# EAGLE board open1541 (EAGLE 5.01)

Size 90 x 60 mm. Coordinates in mm from the lower left corner, seen from the top.
Outline: 0,0 90,0 90,60 0,60 0,0
Copper layers (1*16): Top 0.035mm / dielectric 1.5mm / Bottom 0.035mm
Design rules "default *": minimum track width 8mil, minimum drill 24mil, track to track 8mil, track to pad 8mil, pad to pad 8mil, via to via 8mil, smd to smd 6mil, copper to edge 40mil, drill to drill 8mil, minimum pad ring 10mil, minimum via ring 8mil, stop-mask expansion 4mil, vias tented up to drill 0mil, thermal gap 10mil

## Footprints (pad centres in the part's own frame; a part is rotated, then mirrored left to right if it is on the bottom)
RN-5 = drill 0.813 long: 1 -5.08,0; 2 -2.54,0; 3 0,0; 4 2.54,0; 5 5.08,0
C050-024X044 = drill 0.813 octagon: 1 -2.54,0; 2 2.54,0
SQFP-S-10X10-64 = smd 0.3 x 1.6: 1 -3.75,-5.6; 2 -3.25,-5.6; 3 -2.75,-5.6; 4 -2.25,-5.6; 5 -1.75,-5.6; 6 -1.25,-5.6; 7 -0.75,-5.6; 8 -0.25,-5.6; 9 0.25,-5.6; 10 0.75,-5.6; 11 1.25,-5.6; 12 1.75,-5.6; 13 2.25,-5.6; 14 2.75,-5.6; 15 3.25,-5.6; 16 3.75,-5.6; 33 3.75,5.6; 34 3.25,5.6; 35 2.75,5.6; 36 2.25,5.6; 37 1.75,5.6; 38 1.25,5.6; 39 0.75,5.6; 40 0.25,5.6; 41 -0.25,5.6; 42 -0.75,5.6; 43 -1.25,5.6; 44 -1.75,5.6; 45 -2.25,5.6; 46 -2.75,5.6; 47 -3.25,5.6; 48 -3.75,5.6 | smd 1.6 x 0.3: 17 5.6,-3.75; 18 5.6,-3.25; 19 5.6,-2.75; 20 5.6,-2.25; 21 5.6,-1.75; 22 5.6,-1.25; 23 5.6,-0.75; 24 5.6,-0.25; 25 5.6,0.25; 26 5.6,0.75; 27 5.6,1.25; 28 5.6,1.75; 29 5.6,2.25; 30 5.6,2.75; 31 5.6,3.25; 32 5.6,3.75; 49 -5.6,3.75; 50 -5.6,3.25; 51 -5.6,2.75; 52 -5.6,2.25; 53 -5.6,1.75; 54 -5.6,1.25; 55 -5.6,0.75; 56 -5.6,0.25; 57 -5.6,-0.25; 58 -5.6,-0.75; 59 -5.6,-1.25; 60 -5.6,-1.75; 61 -5.6,-2.25; 62 -5.6,-2.75; 63 -5.6,-3.25; 64 -5.6,-3.75
DIL8 = drill 0.8 square: 1 -3.81,3.81; 2 -3.81,1.27; 3 -3.81,-1.27; 4 -3.81,-3.81; 5 3.81,-3.81; 6 3.81,-1.27; 7 3.81,1.27; 8 3.81,3.81
DIL14 = drill 0.813 long: 1 -7.62,-3.81; 2 -5.08,-3.81; 3 -2.54,-3.81; 4 0,-3.81; 5 2.54,-3.81; 6 5.08,-3.81; 7 7.62,-3.81; 8 7.62,3.81; 9 5.08,3.81; 10 2.54,3.81; 11 0,3.81; 12 -2.54,3.81; 13 -5.08,3.81; 14 -7.62,3.81
SSOP28 = smd 0.4 x 1.5: 1 -4.225,-3.625; 2 -3.575,-3.625; 3 -2.925,-3.625; 4 -2.275,-3.625; 5 -1.625,-3.625; 6 -0.975,-3.625; 7 -0.325,-3.625; 8 0.325,-3.625; 9 0.975,-3.625; 10 1.625,-3.625; 11 2.275,-3.625; 12 2.925,-3.625; 13 3.575,-3.625; 14 4.225,-3.625; 15 4.225,3.625; 16 3.575,3.625; 17 2.925,3.625; 18 2.275,3.625; 19 1.625,3.625; 20 0.975,3.625; 21 0.325,3.625; 22 -0.325,3.625; 23 -0.975,3.625; 24 -1.625,3.625; 25 -2.275,3.625; 26 -2.925,3.625; 27 -3.575,3.625; 28 -4.225,3.625
JP1 = drill 0.914 long: 1 0,-1.27; 2 0,1.27
HC49/S = drill 0.813 round: 1 -2.413,0; 2 2.413,0
0204/7 = drill 0.813 octagon: 1 -3.81,0; 2 3.81,0
16P = drill 0.914 long: 1 -19.05,0; 2 -16.51,0; 3 -13.97,0; 4 -11.43,0; 5 -8.89,0; 6 -6.35,0; 7 -3.81,0; 8 -1.27,0; 9 1.27,0; 10 3.81,0; 11 6.35,0; 12 8.89,0; 13 11.43,0; 14 13.97,0; 15 16.51,0; 16 19.05,0
02P = drill 0.914 long: 1 -1.27,0; 2 1.27,0
04P = drill 0.914 long: 1 -3.81,0; 2 -1.27,0; 3 1.27,0; 4 3.81,0
MA06-2 = drill 1.016 octagon: 1 -6.35,-1.27; 2 -6.35,1.27; 3 -3.81,-1.27; 4 -3.81,1.27; 5 -1.27,-1.27; 6 -1.27,1.27; 7 1.27,-1.27; 8 1.27,1.27; 9 3.81,-1.27; 10 3.81,1.27; 11 6.35,-1.27; 12 6.35,1.27
DM1B-DSF-PEJ(22) = smd 1.25 x 2.5: 1 -6.875,15; 2 -4.375,15; 3 -1.875,15; 4 0.625,15; 5 3.125,15; 6 5.625,15; 7 8.05,15; 8 9.75,15; 9 -9.47,15; COMMON 12.8,15 | drill 1.3 pad 1.7 round: A1 -12.57,14.55; A2 -5.62,12.7; A3 2.03,12.7; A4 11.23,12.35 | drill 1.5 pad 2 round: B 13.255,-14.85 | drill 2 pad 2.5 round: C -14.25,-14.45 | smd 0.8 x 2.5: DETECT 11.2,15 | smd 2.8 x 3.5: WP 13.3,-11.5
DIN45322-PRINT = drill 1.4 pad 2.54 round: 1 -7.5,-2.5; 2 -5,-5; 3 0,-2.5; 4 5,-5; 5 7.5,-2.5; 6 0,-7.5 | drill 1.4 pad 2.54 long: GND1 -5,7.5; GND2 5,7.5

## Placement (x,y rotation side)
10K  [RN-5]  60.96,38.1 0 top
C1  39p  [C050-024X044]  7.62,30.48 180 top
C2  39p  [C050-024X044]  7.62,35.56 180 top
C3  100n  [C050-024X044]  15.24,22.86 270 top
IC1  LPC213X  [SQFP-S-10X10-64]  27.94,25.4 180 bottom
IC2  TDA7052DIL8  [DIL8]  7.62,10.16 0 top
IC3  74LS05N  [DIL14]  49.53,19.05 270 top
IC4  FT232RL  [SSOP28]  44.45,34.29 0 bottom
JP1  FLASH  [JP1]  17.78,15.24 270 top
Q1  16 MHz  [HC49/S]  15.24,33.02 270 top
R1  100k  [0204/7]  10.16,21.59 270 top
R2  10k  [0204/7]  26.67,15.24 0 top
R3  1k  [0204/7]  5.08,21.59 270 top
R4  [0204/7]  39.37,24.13 90 top
R5  [0204/7]  41.91,24.13 90 top
SL1  Display  [16P]  22.86,41.91 0 top
SL2  Speaker 8 Ohm  [02P]  19.05,8.89 270 top
SL3  LEDS  [04P]  36.83,12.7 180 top
SV2  ParPort  [MA06-2]  34.29,6.51 0 top
X1  DM1B-DSF-PEJ(22)"  [DM1B-DSF-PEJ(22)]  72.39,21.59 270 bottom
X2  IEC-BUS"  [DIN45322-PRINT]  58.42,49.53 0 top

## Library data of the parts
10K = resistor-net
C1-C3 R1-R5 = resistor
IC1 = lpc213x
IC2 X1 X2 = open1541
IC3 = 74xx-eu
IC4 = ftdichip
JP1 = jumper
Q1 = crystal
SL1-SL3 = con-amp-quick
SV2 = con-lstb

## Nets
+3V3: IC1.7 IC1.23 IC1.43 IC1.49 IC1.51 IC1.63 IC4.4 R2.2 SL3.2 SL3.3 X1.4
+5V: 10K.1 IC2.1 IC4.20 SL1.2 SL1.3
AOUT: C3.2 IC1.9
ATNIN: IC1.64 IC3.10
CLKIN: IC1.60 IC3.8
CLKOUT: IC1.13 IC3.5
DATAIN: IC1.56
DATAOUT: IC1.14
GND: C1.2 C2.2 IC1.6 IC1.18 IC1.25 IC1.42 IC1.50 IC1.59 IC2.3 IC2.6 IC3.7 IC4.7 IC4.18 IC4.21 IC4.25 JP1.1 R3.1 SL1.1 X1.3 X1.6 X1.8 X1.9 X1.COMMON X2.2
IECATN: 10K.3 IC3.11 X2.3
IECCLOCK: 10K.4 IC3.6 IC3.9 X2.4
IECDATA: 10K.5 IC3.1 IC3.4 X2.5
N$2: IC1.30 X1.2
N$3: IC1.31
N$5: C1.1 IC1.61 Q1.2
N$6: C2.1 IC1.62 Q1.1
N$7: IC1.41 JP1.2 R2.1
N$8: R3.2
N$9: IC2.8 SL2.1
N$10: IC2.5 SL2.2
N$11: R4.1 SL3.4
N$12: IC2.2 R1.2
N$13: C3.1 R1.1
N$14: IC1.19 IC4.5
N$15: IC1.17 R4.2
N$17: IC1.21 IC4.1
N$18: IC1.15 R5.2
PP0: IC1.16 SV2.2
PP1: IC1.12 SV2.3
PP2: IC1.8 SV2.4
PP3: IC1.4 SV2.5
PP4: IC1.48 SV2.6
PP5: IC1.44 SV2.7
PP6: IC1.40 SV2.8
PP7: IC1.36 SV2.9
READY: R5.1 SL3.1
RESET: 10K.2 X2.6
VCC: IC3.14

## Tracks (layer width: path | path; a pad name or v marks a point on that pad's centre or on a via)
+3V3  (10 unrouted)
+5V  (4 unrouted)
AOUT  (1 unrouted)
ATNIN  (1 unrouted)
CLKIN  (1 unrouted)
CLKOUT  (1 unrouted)
GND  (23 unrouted)
IECATN  (2 unrouted)
IECCLOCK  (3 unrouted)
IECDATA  (3 unrouted)
N$2  (1 unrouted)
N$5  (2 unrouted)
N$6  (2 unrouted)
N$7  (2 unrouted)
N$9  (1 unrouted)
N$10  (1 unrouted)
N$11  (1 unrouted)
N$12  (1 unrouted)
N$13  (1 unrouted)
N$14  (1 unrouted)
N$15  (1 unrouted)
N$17  (1 unrouted)
N$18  (1 unrouted)
PP0  (1 unrouted)
PP1  (1 unrouted)
PP2  (1 unrouted)
PP3  (1 unrouted)
PP4  (1 unrouted)
PP5  (1 unrouted)
PP6  (1 unrouted)
PP7  (1 unrouted)
READY  (1 unrouted)
RESET  (1 unrouted)